# Altium PCB PCB2.PcbDoc
Units mil, origin at the board's own origin, x right, y up, seen from the top; angles counter-clockwise.
Board outline 6000 x 4000 mil, 2 copper layers (Top Layer, Bottom Layer); 141 components, 86 nets, 423 pads, 54 vias.
Unrouted connection lines stored in the file: 285.
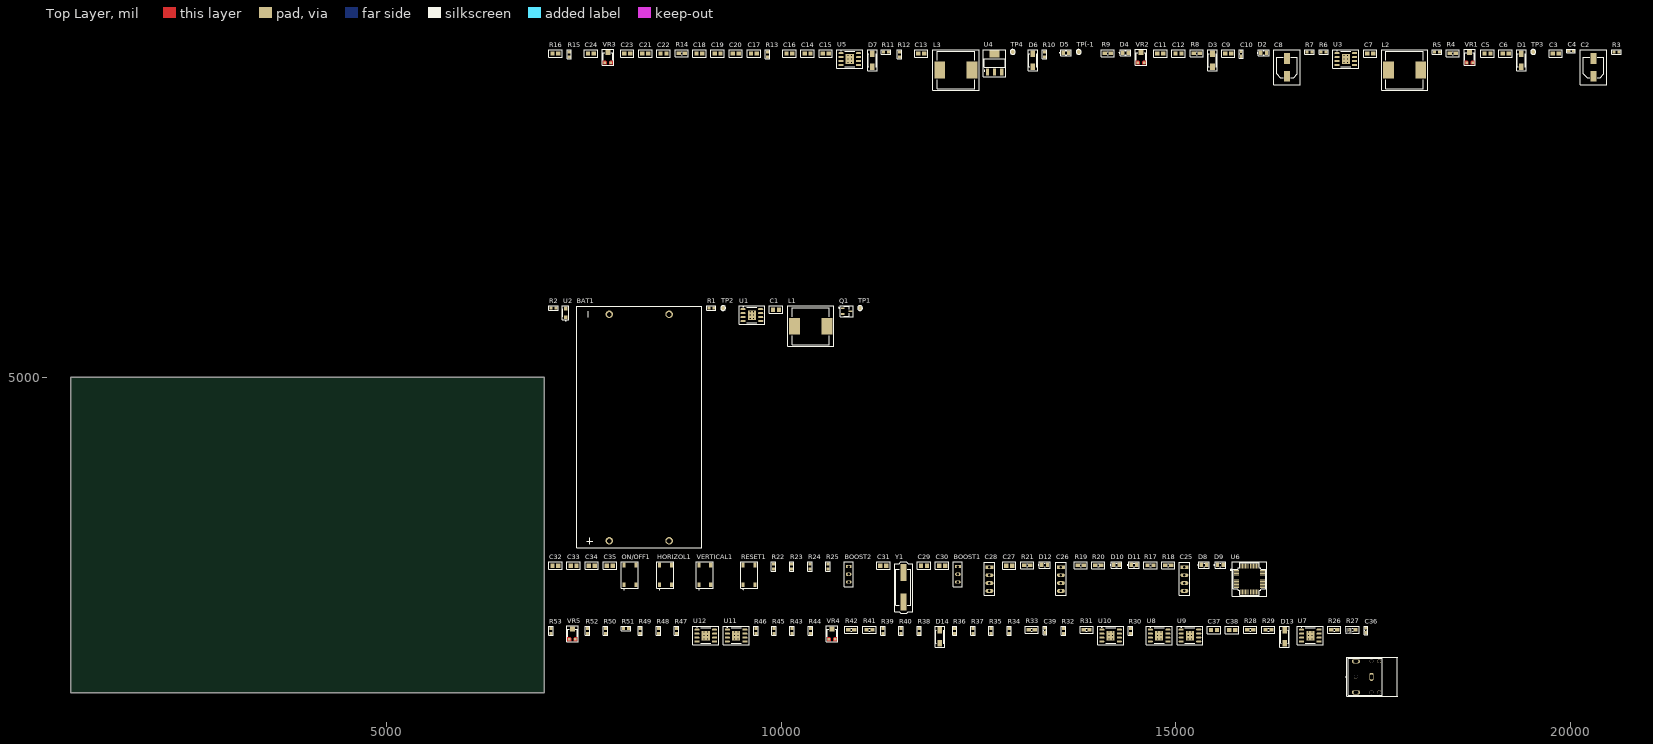
[diagram p0: Top Layer view]
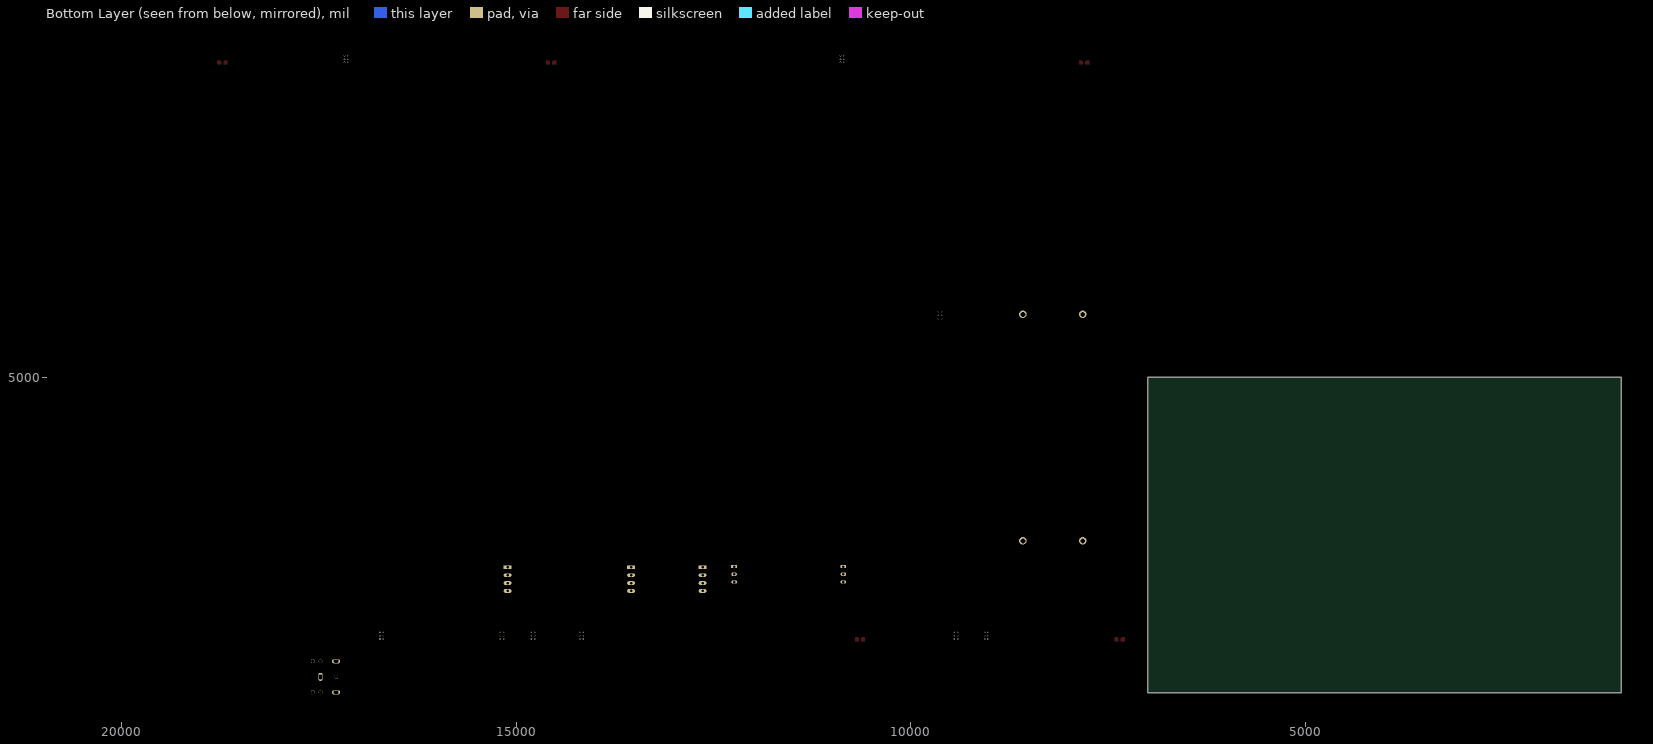
[diagram p1: Bottom Layer view, seen from below]

## Layer stack, top to bottom
Top Solder: solder mask 0.4, Solder Resist, Dk 3.5
Top Layer: signal copper 1.4
Dielectric 1: dielectric 12.6, FR-4, Dk 4.8
Bottom Layer: signal copper 1.4
Bottom Solder: solder mask 0.4, Solder Resist, Dk 3.5

## Board outline
1000,1000 7000,1000 7000,5000 1000,5000

## Design rules (kind name [scope] priority, off if disabled: settings)
Clearance [All] p1: gap=10 ignorepadtopadclearanceinfootprint=FALSE
PolygonConnect [All] p1: connectstyle=Relief reliefconductorwidth=10 reliefentries=4 polygonreliefangle="90 Angle" airgapwidth=10
RoutingVias [All] p1: holewidth=28 width=50 viastyle="Through Hole" minholewidth=28 minwidth=50 maxholewidth=28 maxwidth=50
SolderMaskExpansion [All] p1: expansion=4 istentingtop=FALSE
SupplyNets "Schematic Supply Nets_4" [InNet('-5')] p1: voltage=0.000
SupplyNets "Schematic Supply Nets_3" [InNet('+VBAT')] p2: voltage=0.000
SupplyNets "Schematic Supply Nets_2" [InNet('+5')] p3: voltage=0.000
SupplyNets "Schematic Supply Nets_1" [InNet('VDD3.3V')] p4: voltage=0.000
SupplyNets "Schematic Supply Nets" [InNet('GND')] p5: voltage=0.000
Width [All] p1: maxlimit=10 minlimit=10 preferedwidth=10
30 further rules are at their usual default settings.

## Classes and differential pairs
component class "Power supply": BAT1 C1 C2 C3 C4 C5 C6 C7 C8 C9 C10 C11 C12 C13 C14 C15 C16 C17 C18 C19 C20 C21 C22 C23 C24 D1 D2 D3 D4 D5 D6 D7 L1 L2 L3 Q1 R1 R2 R3 R4 R5 R6 R7 R8 R9 R10 R11 R12 R13 R14 R15 R16 TP1 TP2 TP3 TP4 TP(-1 U1 U2 U3 U4 U5 VR1 VR2 VR3
component class MCU: BOOST1 BOOST2 C25 C26 C27 C28 C29 C30 C31 C32 C33 C34 C35 D8 D9 D10 D11 D12 HORIZOL1 ON/OFF1 R17 R18 R19 R20 R21 R22 R23 R24 R25 RESET1 U6 VERTICAL1 Y1
component class EOG_FRONT_END: C36 C37 C38 C39 D13 D14 J1 R26 R27 R28 R29 R30 R31 R32 R33 R34 R35 R36 R37 R38 R39 R40 R41 R42 R43 R44 R45 R46 R47 R48 R49 R50 R51 R52 R53 U7 U8 U9 U10 U11 U12 VR4 VR5

## Components (designator, comment, footprint, x,y, rotation, side; value= is the part's Value field where it differs from the comment)
BAT1 "Dual_Battery_Case" Dual_BAT_PCB 8205,4360 r90 top value=N/A
BOOST1 "CONNECTOR_4" CON-3 12240,2600 r0 top value=N/A
BOOST2 "CONNECTOR_4" CON-3 10855,2600 r0 top value=N/A
C1 "0.01uF" "CAPCER 0805 SMD" 9935,5855 r0 top
C2 "330uF" "CAP ALU 6377" 20295,8925 r90 top
C3 "0.1uF" "CAPCER 0805 SMD" 19815,9100 r0 top
C4 "10uF" "CAPCER 0603 SMD" 20010,9130 r0 top
C5 "0.1uF" "CAPCER 0805 SMD" 18950,9100 r0 top
C6 "0.1uF" "CAPCER 0805 SMD" 19180,9100 r0 top
C7 "0.01uF" "CAPCER 0805 SMD" 17465,9100 r0 top
C8 "220uF" "CAP ALU 6377" 16410,8925 r90 top
C9 "0.1uF" "CAPCER 0805 SMD" 15665,9100 r0 top
C10 "10uF" "CAPCER 0603 SMD" 15830,9095 r90 top
C11 "0.1uF" "CAPCER 0805 SMD" 14805,9100 r0 top
C12 "0.1uF" "CAPCER 0805 SMD" 15035,9100 r0 top
C13 "0.1uF" "CAPCER 0805 SMD" 11775,9100 r0 top
C14 "47pF" "CAPCER 0805 SMD" 10335,9100 r0 top
C15 "47pF" "CAPCER 0805 SMD" 10565,9100 r0 top
C16 "22uF" "CAPCER 0805 SMD" 10105,9100 r0 top
C17 "22uF" "CAPCER 0805 SMD" 9655,9100 r0 top
C18 "4.7uF" "CAPCER 0805 SMD" 8965,9100 r0 top
C19 "4.7uF" "CAPCER 0805 SMD" 9195,9100 r0 top
C20 "4.7uF" "CAPCER 0805 SMD" 9425,9100 r0 top
C21 "1nF" "CAPCER 0805 SMD" 8280,9100 r0 top
C22 "10uF" "CAPCER 0805 SMD" 8510,9100 r0 top
C23 "0.01uF" "CAPCER 0805 SMD" 8050,9100 r0 top
C24 "47pF" "CAPCER 0805 SMD" 7590,9100 r0 top
C25 "CONNECTOR_4" CON-4 15110,2590 r0 top value=CON-4
C26 "CONNECTOR_4" CON-4 13545,2590 r0 top value=CON-4
C27 "22pF" "CAPCER 0805 SMD" 12890,2610 r0 top
C28 "CONNECTOR_4" CON-4 12640,2590 r0 top value=CON-4
C29 "4.7uF" "CAPCER 0805 SMD" 11810,2610 r0 top
C30 "4.7uF" "CAPCER 0805 SMD" 12040,2610 r0 top
C31 "22pF" "CAPCER 0805 SMD" 11295,2610 r0 top
C32 "0.1uF" "CAPCER 0805 SMD" 7140,2610 r0 top
C33 "0.1uF" "CAPCER 0805 SMD" 7370,2610 r0 top
C34 "0.1uF" "CAPCER 0805 SMD" 7600,2610 r0 top
C35 "0.1uF" "CAPCER 0805 SMD" 7830,2610 r0 top
C36 "10uF" "CAPCER 0603 SMD" 17410,1790 r90 top
C37 "0.1uF" "CAPCER 0805 SMD" 15485,1795 r0 top
C38 "0.1uF" "CAPCER 0805 SMD" 15715,1795 r0 top
C39 "10uF" "CAPCER 0603 SMD" 13345,1790 r90 top
D1 "SS34" DO-214AC 19380,9015 r90 top
D2 "LED_RED" "LED 0805 SMD" 16115,9110 r0 top value=5V
D3 "SS34" DO-214AC 15465,9015 r90 top
D4 "LED_RED" "LED 0805 SMD" 14365,9110 r0 top value=3.3V
D5 "LED_RED" "LED 0805 SMD" 13610,9110 r0 top value=VBAT
D6 "SS34" DO-214AC 13190,9015 r90 top
D7 "SS34" DO-214AC 11155,9015 r90 top
D8 "LED_RED" "LED 0805 SMD" 15360,2620 r0 top value=LED_UP
D9 "LED_RED" "LED 0805 SMD" 15565,2620 r0 top value=LED_RIGHT
D10 "LED_RED" "LED 0805 SMD" 14250,2620 r0 top value=LED_DOWN
D11 "LED_RED" "LED 0805 SMD" 14470,2620 r0 top value=LED_LEFT
D12 "LED_RED" "LED 0805 SMD" 13340,2620 r0 top value=LED_LIFE
D13 "SMAJ5.0" DO-214AC 16380,1710 r90 top value=3A-1KV
D14 "SMAJ5.0" DO-214AC 12010,1710 r90 top value=3A-1KV
HORIZOL1 "BUTTON" BUTTON_SMD 8535,2495 r90 top value=N/A
J1 "JACK 3.5mm" JACK_3.5 17470,1196.85 r90 top value=N/A
L1 "10uH" "INDUCTOR 1280 SMD" 10375,5645 r0 top
L2 "15uH" "INDUCTOR 1280 SMD" 17900,8890 r0 top
L3 "10uH" "INDUCTOR 1280 SMD" 12215,8890 r0 top
ON/OFF1 "BUTTON" BUTTON_SMD 8085,2495 r90 top value=N/A
Q1 "AO3407A" SOT23-3 10830,5835 r0 top value="30V 4.3A"
R1 "10KR" "RESC 0603(1608) SMD" 9115,5875 r0 top
R2 "100KR" "RESC 0603(1608) SMD" 7115,5875 r0 top
R3 "10KR" "RESC 0603(1608) SMD" 20585,9120 r0 top
R4 "33KR" "RESC 0805 SMD" 18510,9105 r0 top
R5 "10KR" "RESC 0603(1608) SMD" 18310,9120 r0 top
R6 "10KR" "RESC 0603(1608) SMD" 16875,9120 r0 top
R7 "10KR" "RESC 0603(1608) SMD" 16695,9120 r0 top
R8 "330R" "RESC 0805 SMD" 15265,9105 r0 top
R9 "330R" "RESC 0805 SMD" 14140,9105 r0 top
R10 "680R" "RESC 0603(1608) SMD" 13335,9090 r90 top
R11 "0R" "RESC 0603(1608) SMD" 11330,9120 r0 top value=0KR
R12 "10KR" "RESC 0603(1608) SMD" 11500,9090 r90 top
R13 "10KR" "RESC 0603(1608) SMD" 9825,9090 r90 top
R14 "200R" "RESC 0805 SMD" 8740,9105 r0 top
R15 "27KR" "RESC 0603(1608) SMD" 7315,9090 r90 top
R16 "2.4KR" "CAPCER 0805 SMD" 7140,9100 r0 top
R17 "330R" "RESC 0805 SMD" 14680,2615 r0 top
R18 "330R" "RESC 0805 SMD" 14905,2615 r0 top
R19 "330R" "RESC 0805 SMD" 13795,2615 r0 top
R20 "330R" "RESC 0805 SMD" 14020,2615 r0 top
R21 "330R" "RESC 0805 SMD" 13120,2615 r0 top
R22 "10KR" "RESC 0603(1608) SMD" 9905,2600 r90 top
R23 "10KR" "RESC 0603(1608) SMD" 10135,2600 r90 top
R24 "10KR" "RESC 0603(1608) SMD" 10365,2600 r90 top
R25 "10KR" "RESC 0603(1608) SMD" 10595,2600 r90 top
R26 "300KR" "RESC 0805 SMD" 17010,1800 r0 top
R27 "1.6MR" "RESC 0805 SMD" 17240,1800 r0 top
R28 "270R" "RESC 0805 SMD" 15945,1800 r0 top
R29 "270R" "RESC 0805 SMD" 16175,1800 r0 top
R30 "10KR" "RESC 0603(1608) SMD" 14425,1785 r90 top
R31 "300KR" "RESC 0805 SMD" 13870,1800 r0 top
R32 "10KR" "RESC 0603(1608) SMD" 13580,1785 r90 top
R33 "1.6MR" "RESC 0805 SMD" 13175,1800 r0 top
R34 "10KR" "RESC 0603(1608) SMD" 12890,1785 r90 top
R35 "10KR" "RESC 0603(1608) SMD" 12660,1785 r90 top
R36 "510R" "RESC 0603(1608) SMD" 12200,1785 r90 top value=20R
R37 "510R" "RESC 0603(1608) SMD" 12430,1785 r90 top value=20R
R38 "10KR" "RESC 0603(1608) SMD" 11750,1785 r90 top
R39 "10KR" "RESC 0603(1608) SMD" 11290,1785 r90 top
R40 "10KR" "RESC 0603(1608) SMD" 11520,1785 r90 top
R41 "5.6KR" "RESC 0805 SMD" 11120,1800 r0 top
R42 "5.6KR" "RESC 0805 SMD" 10890,1800 r0 top
R43 "12KR" "RESC 0603(1608) SMD" 10140,1785 r90 top value=30R
R44 "12KR" "RESC 0603(1608) SMD" 10370,1785 r90 top value=30R
R45 "300R" "RESC 0603(1608) SMD" 9910,1785 r90 top
R46 "300R" "RESC 0603(1608) SMD" 9680,1785 r90 top
R47 "10KR" "RESC 0603(1608) SMD" 8675,1785 r90 top
R48 "10KR" "RESC 0603(1608) SMD" 8445,1785 r90 top
R49 "10KR" "RESC 0603(1608) SMD" 8215,1785 r90 top
R50 "10KR" "RESC 0603(1608) SMD" 7775,1785 r90 top
R51 "10KR" "RESC 0603(1608) SMD" 8035,1815 r0 top
R52 "10KR" "RESC 0603(1608) SMD" 7545,1785 r90 top value=20KR
R53 "10KR" "RESC 0603(1608) SMD" 7085,1785 r90 top
RESET1 "BUTTON" BUTTON_SMD 9595,2495 r90 top value=N/A
TP1 "TEST_POINT" Test_point 11000,5875 r0 top value=N/A
TP2 "TEST_POINT" Test_point 9265,5875 r90 top value=N/A
TP3 "TEST_POINT" Test_point 19530,9120 r90 top value=N/A
TP4 "TEST_POINT" Test_point 12935,9120 r90 top value=N/A
TP(-1 "TEST_POINT" Test_point 13770,9120 r90 top value=N/A
U1 "TPS5430DDAR" 8-SOIC 9630,5785 r0 top value=TPS5430DDR
U2 "BZT52H" SOD-123F 7270,5815 r90 top value=12V
U3 "TPS5430DDAR" 8-SOIC 17155,9030 r0 top value=TPS5430DDR
U4 "AMS1117-ADJ" SOT-223 12705,8980 r0 top value=AMS1117
U5 "TPS54331DR" 8-SOIC 10870,9030 r0 top value=N/A
U6 "STM32F103C8T6" LQFP48 15935,2440 r0 top
U7 "INA128UA" 8-SOIC 16705,1725 r0 top value=N/A
U8 "OPA188AID" 8-SOIC 14790,1725 r0 top
U9 "OPA188AID" 8-SOIC 15180,1725 r0 top value=N/A
U10 "OPA188AID" 8-SOIC 14175,1725 r0 top
U11 "OPA2134UA" 8-SOIC 9430,1725 r0 top value=N/A
U12 "OPA188AID" 8-SOIC 9045,1725 r0 top value=N/A
VERTICAL1 "BUTTON" BUTTON_SMD 9035,2495 r90 top value=N/A
VR1 "VR_10KR" EVM3E 18725,9045 r0 top
VR2 "VR_10KR" EVM3E 14560,9045 r0 top
VR3 "VR_10KR" EVM3E 7805,9045 r0 top
VR4 "VR_10KR" EVM3E 10645,1740 r0 top
VR5 "VR_10KR" EVM3E 7355,1740 r0 top
Y1 "Thạch Anh 8Mhz" HC49-S 11550,2335 r90 top value=8MHz

## Footprints (in the part's own frame and the unit in brackets; to place one, negate y for a bottom-side part, rotate by r counter-clockwise, add the part's x,y. Pads: shape width x height; smd on the part's side, far side on the other; paste and mask are expansions set on the pad)
8-SOIC [mm] "SOIC, 8-Leads, Body 4.90x3.90mm, Pitch 1.27mm, Thermal Pad 3.10x2.60mm, IPC Low Density"
  oval 1.65x0.65 smd: 1(-2.825,1.905) 2(-2.825,0.635) 3(-2.825,-0.635) 4(-2.825,-1.905) 5(2.825,-1.905) 6(2.825,-0.635) 7(2.825,0.635) 8(2.825,1.905)
  rect 2.6x3.1 smd: 9(0,0)
  silkscreen extent -4.15,-3 4.15,3, body extent -3,-2.5 3,2.5, height 1.7
BUTTON_SMD [mm]
  rect 1.5x1 smd: 1(-3.15,1.925) 1(3.15,1.925) 2(-3.15,-1.875) 2(3.15,-1.875)
  silkscreen extent -4.75,-2.72 4.2,2.78, body extent -3.3,-2.47 3.3,2.53, height 1.52
"CAP ALU 6377" [mm] "Aluminum Electrolytic Capacitor, Body 6.60x6.60x7.70mm, IPC Low Density"
  rect 3.45x1.85 smd: 1(-2.85,0) 2(2.85,0)
  silkscreen extent -5.6,-4.3 5.6,4.3, body extent -3.8,-3.3 3.8,3.3, height 7.7
"CAPCER 0603 SMD" [mm]
  rect 1x0.95 smd mask+0.076: 1(-0.75,0) 2(0.75,0)
  silkscreen extent -1.35,-0.58 1.37,0.58, body extent -0.8,-0.4 0.8,0.4, height 0.9
"CAPCER 0805 SMD" [mm]
  rect 1.4x1.4 smd: 1(-0.955,0) 2(0.955,0)
  silkscreen extent -2.15,-1.2 2.15,1.2, body extent -1,-0.64 1,0.64, height 1.25
CON-3 [mil]
  rect 72x40 hole 31.5: 1(0,0)
  oval 72x40 hole 31.5: 2(0,-98.43) 3(0,-196.85)
  round 40 on Top Overlay: ""(85,9)
  silkscreen extent -58,-255 57,58, body extent -50,-248 50,52, height 337
CON-4 [mm]
  rect 2.5x1.2 hole 0.8: 1(0,0)
  oval 2.5x1.2 hole 0.8: 2(0,-2.54) 3(0,-5.08) 4(0,-7.62)
  round 1.016 on Top Overlay: ""(2.311,0.178)
  silkscreen extent -1.63,-9.02 1.68,1.68, body extent -1.14,-8.76 1.4,1.4, height 8.55
DO-214AC [mm]
  rect 2.12x1.5 smd: 1(-2.115,0) 2(2.115,0)
  silkscreen extent -3.42,-1.53 3.42,1.53, body extent -2.57,-1.27 2.57,1.29, height 2.5
Dual_BAT_PCB [mm]
  round 2.4 hole 1.6: 1+(-36.422,9.726) 1-(36.478,9.726) 2+(-36.422,-9.574) 2-(36.478,-9.574)
  silkscreen extent -38.67,-20.03 39.03,20.18, body extent -38.56,-20.07 39.14,20.14, height 24.74
EVM3E [mm]
  rect 0.8x0.8 smd paste-1 mask+0: 1(-1.014,-1.535) 3(0.986,-1.535)
  rect 1.6x1.5 smd: 2(-0.014,1.715)
  Top Layer region: -0.414,-1.235 -0.414,-2.135 -1.614,-2.135 -1.614,-0.935 -0.714,-0.935
  Top Layer region: 1.586,-2.135 0.386,-2.135 0.386,-1.235 0.686,-0.935 1.586,-0.935
  silkscreen extent -1.83,-2.41 1.83,2.72, body extent -1.56,-2.09 1.54,1.71, height 1.62
HC49-S [mm]
  rect 5.5x2 smd: 1(-4.75,0.025) 2(4.75,0.025)
  silkscreen extent -8.28,-2.95 8.2,2.88, body extent -6.7,-2.42 6.7,2.48, height 4.3
"INDUCTOR 1280 SMD" [mm] "Precision Wire Wound Inductor, 2-Leads, Body 12.00x12.00mm, IPC Low Density"
  rect 3.5x5.4 smd: 1(-5.2,0) 2(5.2,0)
  silkscreen extent -7.42,-6.5 7.42,6.5, body extent -6.1,-6 6.1,6, height 8.1
JACK_3.5 [mm]
  oval 2.616x1.308 hole 0.8 slot 1.5 at 0 deg: 1(0.127,-0.254)
  oval 1.308x2.616 hole 0.8 slot 1.5 at 90 deg: 2(5.127,4.746) 3(-4.873,4.746)
  round 1.2 hole 1.2 unplated: ""(-4.873,-2.754) ""(-4.873,-0.254) ""(0.127,4.746) ""(5.127,-2.754) ""(5.127,-0.254)
  silkscreen extent -6.12,-8.64 6.38,8.05, body extent -5.87,-7.07 6.13,7.23, height 6.01
"LED 0805 SMD" [mm]
  rect 1.1x1.45 smd: A(0.9,0) C(-0.9,0)
  silkscreen extent -2.1,-1 1.7,1, body extent -1,-0.63 1,0.63, height 0.7
LQFP48 [mm]
  rrect50% 1.56x0.28 smd: 1(-4.18,2.775) 2(-4.18,2.275) 3(-4.18,1.775) 4(-4.18,1.275) 5(-4.18,0.775) 6(-4.18,0.275) 7(-4.18,-0.225) 8(-4.18,-0.725) 9(-4.18,-1.225) 10(-4.18,-1.725) 11(-4.18,-2.225) 12(-4.18,-2.725) 25(4.18,-2.725) 26(4.18,-2.225) 27(4.18,-1.725) 28(4.18,-1.225) 29(4.18,-0.725) 30(4.18,-0.225) 31(4.18,0.275) 32(4.18,0.775) 33(4.18,1.275) 34(4.18,1.775) 35(4.18,2.275) 36(4.18,2.775)
  rrect50% 0.28x1.56 smd: 13(-2.75,-4.155) 14(-2.25,-4.155) 15(-1.75,-4.155) 16(-1.25,-4.155) 17(-0.75,-4.155) 18(-0.25,-4.155) 19(0.25,-4.155) 20(0.75,-4.155) 21(1.25,-4.155) 22(1.75,-4.155) 23(2.25,-4.155) 24(2.75,-4.155) 37(2.75,4.205) 38(2.25,4.205) 39(1.75,4.205) 40(1.25,4.205) 41(0.75,4.205) 42(0.25,4.205) 43(-0.25,4.205) 44(-0.75,4.205) 45(-1.25,4.205) 46(-1.75,4.205) 47(-2.25,4.205) 48(-2.75,4.205)
  silkscreen extent -6.15,-5.51 5.61,5.54, body extent -4.5,-4.47 4.5,4.53, height 1.6
"RESC 0603(1608) SMD" [mm] "Chip Resistor 0603"
  rect 0.95x1 smd: 1(-0.8,0) 2(0.8,0)
  silkscreen extent -1.5,-0.71 1.5,0.71, body extent -0.8,-0.4 0.8,0.4, height 0.45
"RESC 0805 SMD" [mm]
  rect 1.4x1.2 smd: 1(-0.955,0) 2(0.955,0)
  silkscreen extent -2.1,-1.1 2.1,1.1, body extent -1,-0.6 1,0.6, height 0.5
SOD-123F [mm]
  rect 1.2x1.2 smd paste-0.05: 1(-1.4,0) 2(1.4,0)
  silkscreen extent -2.6,-1.06 2.25,1.04, body extent -1.75,-0.8 1.75,0.8, height 1.2
SOT23-3 [mm]
  rrect25% 1.21x0.59 smd: 1(-1.255,0.95) 2(-1.255,-0.95) 3(1.255,0)
  silkscreen extent -2.6,-1.8 2.11,1.8, body extent -1.52,-1.52 1.47,1.57, height 1.25
SOT-223 [mm]
  rect 1x2.4 smd: 1(-2.306,-2.893) 2(-0.006,-2.893) 3(2.294,-2.893)
  rect 3.3x2.4 smd: 2(-0.006,2.907)
  silkscreen extent -3.63,-4.37 3.57,4.33, body extent -3.26,-3.55 3.24,3.41, height 1.68
Test_point [mm]
  round 1.5 smd: 1(0,0)
  silkscreen extent -0.8,-0.8 0.8,0.8

## Part data
BAT1: library part DB-0031, "Dual_Battery_Case_18650", Power Rate=N/A, Design Item ID=DB-0031, Footprint Path=.\Database_Library\Library.PcbLib, Footprint Type=TFT, Supplier Link=https://www.thegioiic.com/de-pin-2x18650-han-pcb, Tolerance=N/A, Type=Case
BOOST1 BOOST2: library part DB-0054, "Hàng Rào Đực Đơn 2.54mm 40 Chân 1 Hàng Cao 11.2mm Xuyên Lỗ", Power Rate=N/A, Design Item ID=DB-0054, Footprint Type=TFT, Size=TFT, Supplier=THEGIOIIC, Supplier Link=https://www.thegioiic.com/hang-rao-duc-don-2-54mm-40-chan-1-hang-cao-11-2mm-xuyen-lo, Supplier Part Number="Hàng Rào Đực Đơn 2.54mm 40 Chân 1 Hàng Cao 11.2mm Xuyên Lỗ", Tolerance=N/A, Type=CONNECTOR
C1 C7 C23: library part DB-0010, "CAPACITOR SMD 0.01uF 50V 10% 0805", Power Rate=N/A, Supplier Part Number="Tụ Gốm 0805 410nF 50V", Tolerance=10%, Design Item ID=DB-0010, Footprint Type=SMD, Size=0805, Supplier=THEGIOIIC, Supplier Link=https://www.thegioiic.com/tu-gom-0805-10nf-50v, Type=CAPACITOR
  C1 C7: Footprint Path=.\Database_Library\Library.PcbLib
C2: library part DB-0044, "CAPACITOR ALU SMD 220uF 6.3V 20% 6377", Power Rate=N/A, Supplier Part Number="Tụ Nhôm SMD 330uF 6.3V 6.3x7.7mm", Tolerance=20%, Design Item ID=DB-0044, Footprint Type=SMD, Size=6377, Supplier=THEGIOIIC, Supplier Link=https://www.thegioiic.com/tu-nhom-smd-330uf-6-3v-6-3x7-7mm, Type="CAPACITOR ALU"
C3 C5 C6 C9 C11 C12 C13 C32 C33 C34 C35 C37 C38: library part DB-0017, "CAPACITOR SMD 0.1uF 50V 10% 0603", Power Rate=N/A, Supplier Part Number="Tụ Gốm 0603 100nF (0.1uF) 25V", Tolerance=10%, Design Item ID=DB-0017, Footprint Type=SMD, Size=0603, Supplier=THEGIOIIC, Supplier Link=https://www.thegioiic.com/tu-gom-0603-100nf-0-1uf-25v, Type=CAPACITOR
  C3 C5 C6 C9 C11 C12: Footprint Path=.\Database_Library\Library.PcbLib
C4 C10 C36 C39: library part DB-0018, "CAPACITOR SMD 10uF 25V 10% 0805", Power Rate=N/A, Supplier Part Number="Tụ Gốm 0805 10uF 25V", Tolerance=10%, Design Item ID=DB-0018, Footprint Type=SMD, Size=0805, Supplier=THEGIOIIC, Supplier Link=https://www.thegioiic.com/tu-gom-0805-10uf-25v, Type=CAPACITOR
  C4 C10: Footprint Path=.\Database_Library\Library.PcbLib
C8: library part DB-0013, "CAPACITOR ALU SMD 220uF 16V 10% 6377", Power Rate=N/A, Supplier Part Number="Tụ Nhôm SMD 220uF 16V 6.3x7.7mm", Design Item ID=DB-0013, Footprint Path=.\Database_Library\Library.PcbLib, Footprint Type=SMD, Size=6377, Supplier=THEGIOIIC, Supplier Link=https://www.thegioiic.com/tu-nhom-smd-220uf-16v-6-3x7-7mm, Tolerance=N/A, Type="CAPACITOR ALU"
C14 C15 C24: library part DB-0036, "CAPACITOR SMD 47pF 50V 10% 0805", Power Rate=N/A, Supplier Part Number="Tụ Gốm 0805 47pF 50V", Tolerance=10%, Design Item ID=DB-0036, Footprint Type=SMD, Size=0805, Supplier=THEGIOIIC, Supplier Link=https://www.thegioiic.com/tu-gom-0805-47pf-50v, Type=CAPACITOR
C16 C17: library part DB-0056, "CAPACITOR SMD 22uF 50V 10% 0805", Power Rate=N/A, Supplier Part Number="Tụ Gốm 0805 22uF 6.3V", Tolerance=10%, Design Item ID=DB-0056, Footprint Type=SMD, Size=0805, Supplier=THEGIOIIC, Supplier Link=https://www.thegioiic.com/tu-gom-0805-22uf-6-3v, Type=CAPACITOR
C18 C19 C20 C29 C30: library part DB-0007, "CAPACITOR SMD 4.7uF 50V 10% 0805", Power Rate=N/A, Supplier Part Number="Tụ Gốm 0805 4.7uF 50V", Tolerance=10%, Design Item ID=DB-0007, Footprint Type=SMD, Size=0805, Supplier=THEGIOIIC, Supplier Link=https://www.thegioiic.com/tu-gom-0805-4-7uf-50v, Type=CAPACITOR
C21: library part DB-0037, "CAPACITOR SMD 1nF 50V 10% 0805", Power Rate=N/A, Supplier Part Number="Tụ Gốm 0805 1nF 50V", Tolerance=10%, Design Item ID=DB-0037, Footprint Type=SMD, Size=0805, Supplier=THEGIOIIC, Supplier Link=https://www.thegioiic.com/tu-gom-0805-1nf-50v, Type=CAPACITOR
C22: library part DB-0058, "CAPACITOR SMD 10uF 25V 10% 0805", Power Rate=N/A, Supplier Part Number="Tụ Gốm 0805 10uF 25V", Tolerance=10%, Design Item ID=DB-0058, Footprint Type=SMD, Size=0805, Supplier=THEGIOIIC, Supplier Link=https://www.thegioiic.com/tu-gom-0805-10uf-25v, Type=CAPACITOR
C25 C26 C28: library part DB-0049, "Hàng Rào Đực Đơn 2.54mm 40 Chân 1 Hàng Cao 11.2mm Xuyên Lỗ", Power Rate=N/A, Design Item ID=DB-0049, Footprint Type=TFT, Size=TFT, Supplier=THEGIOIIC, Supplier Link=https://www.thegioiic.com/hang-rao-duc-don-2-54mm-40-chan-1-hang-cao-11-2mm-xuyen-lo, Supplier Part Number="Hàng Rào Đực Đơn 2.54mm 40 Chân 1 Hàng Cao 11.2mm Xuyên Lỗ", Tolerance=N/A, Type=CONNECTOR
C27 C31: library part DB-0047, "CAPACITOR SMD 22pF 50V 10% 0805", Power Rate=N/A, Supplier Part Number="Tụ Gốm 0805 22pF 50V", Tolerance=10%, Design Item ID=DB-0047, Footprint Type=SMD, Size=0805, Supplier=THEGIOIIC, Supplier Link=https://www.thegioiic.com/tu-gom-0805-22pf-50v, Type=CAPACITOR
D1 D3 D6 D7: library part DB-0032, "SS34 SMC Diode Schottky 3A", Power Rate=N/A, Supplier Part Number="TWGMC SS34 SMA Diode Schottky 3A", Design Item ID=DB-0032, Footprint Type=SMD, Size=SMA, Supplier=THEGIOIIC, Supplier Link=https://www.thegioiic.com/twgmc-ss34-sma-diode-schottky-3a, Tolerance=N/A, Type=DIODE
D2 D4 D5 D8 D9 D10 D11 D12: library part DB-0020, "Size 2x1.2mm, điện áp 1.8-2.6VDC", Power Rate=N/A, Supplier Part Number="LED Đỏ 0805 Dán SMD Trong Suốt Harvatek", Design Item ID=DB-0020, Footprint Type=SMD, Size=0806, Supplier=THEGIOIIC, Supplier Link=https://www.thegioiic.com/led-do-0805-dan-smd-trong-suot-harvatek, Tolerance=N/A, Type=LED
D13 D14: library part DB-0021, "TVS DIODE 5VWM 9.2VC SMA", Power Rate=N/A, Design Item ID=DB-0021, Footprint Type=SMD, Size=SMA, Supplier=DIGIKEY, Supplier Link=https://www.digikey.com/en/products/detail/diodes-incorporated/smaj5-0a-13/278666, Supplier Part Number="TVS DIODE 5VWM 9.2VC SMA", Tolerance=N/A, Type=DIODE
HORIZOL1 ON/OFF1 RESET1 VERTICAL1: library part DB-0051, "Nút Nhấn 4x4mm Cao 1.5mm 4 Chân SMD Chống Nước", Power Rate=N/A, Design Item ID=DB-0051, Footprint Type=SMD, Size=BUTTON_SMD, Supplier=THEGIOIIC, Supplier Link=https://www.thegioiic.com/nut-nhan-4x4mm-cao-1-5mm-4-chan-smd-chong-nuoc, Supplier Part Number="Nút Nhấn 4x4mm Cao 1.5mm 4 Chân SMD Chống Nước", Tolerance=N/A, Type=BUTTON
J1: library part DB-0053, "Jack Audio 3.5mm PJ-320D PJ320D Hàn Board chân dán", Power Rate=N/A, Design Item ID=DB-0053, Footprint Type=SMD, Size=SMD, Supplier="Điện tử Minh Nguyên", Supplier Link=https://chipn24.com/g30-jack-audio-3-5mm-pj-320d-pj320d-han-board-chan-dan-id2179.html, Supplier Part Number="Jack Audio 3.5mm PJ-320D PJ320D Hàn Board chân dán", Tolerance=N/A, Type=CONNECTOR
L1 L3: library part DB-0043, "INDUCTOR SMD 10uH 1280-100 7.1A", Power Rate=N/A, Supplier Part Number="Cuộn Cảm Dán SMD CDRH127 1280-100 10uH 7.8A", Tolerance=20%, Design Item ID=DB-0043, Footprint Type=SMD, Size=1280, Supplier=THEGIOIIC, Supplier Link=https://www.thegioiic.com/cuon-cam-dan-smd-cdrh127-1280-100-10uh-7-8a, Type=INDUCTOR
L2: library part DB-0033, "INDUCTOR SMD 15uH 1280-150 7.1A", Power Rate=N/A, Supplier Part Number="Cuộn Cảm Dán SMD CDRH127 1280-150 15uH 7.1A", Tolerance=20%, Design Item ID=DB-0033, Footprint Type=SMD, Size=1280, Supplier=THEGIOIIC, Supplier Link=https://www.thegioiic.com/cuon-cam-dan-smd-cdrh127-1280-150-15uh-7-1a, Type=INDUCTOR
Q1: library part DB-0041, "AO3407A MOSFET Kênh P 30V 4.3A SOT-23-3", Power Rate=N/A, Design Item ID=DB-0041, Footprint Type=SMD, Size=SOT23-3, Supplier=THEGIOIIC, Supplier Link=https://www.thegioiic.com/ao3407a-mosfet-kenh-p-30v-4-3a-sot-23-3, Supplier Part Number="AO3407A MOSFET Kênh P 30V 4.3A SOT-23-3", Tolerance=N/A, Type=P_MOSFET
R1 R3 R5 R6 R7 R12 R13 R22 R23 R24 R25 R30 R32 R34 R35 R38 R39 R40 R47 R48 R49 R50 R51 R52 R53: library part DB-0003, "RESISTOR SMD 10KR OHM 1% 100mW 0603", Power Rate=100mW, Supplier Part Number="Điện Trở 10 KOhm 0603 1%", Tolerance=1%, Design Item ID=DB-0003, Footprint Type=SMD, Size=0603, Supplier=THEGIOIIC, Supplier Link=https://www.thegioiic.com/dien-tro-10-kohm-0603-1-, Type=RESISTOR
  R1 R3 R6 R7: Footprint Path=.\Database_Library\Library.PcbLib
R2: library part DB-0008, "RESISTOR SMD 100KR OHM 1% 100mW 0603", Power Rate=100mW, Supplier Part Number="Điện Trở 100 KOhm 0603 1%", Tolerance=1%, Design Item ID=DB-0008, Footprint Type=SMD, Size=0603, Supplier=THEGIOIIC, Supplier Link=https://www.thegioiic.com/dien-tro-100-kohm-0603-1-, Type=RESISTOR
R4: library part DB-0059, "RESISTOR SMD 33KR OHM 1% 125mW 0805", Power Rate=125mW, Supplier Part Number="Điện Trở 24 KOhm 0805 Điện Trở 33 KOhm 0805 1%", Tolerance=1%, Design Item ID=DB-0059, Footprint Type=SMD, Size=0805, Supplier=THEGIOIIC, Supplier Link=https://www.thegioiic.com/dien-tro-33-kohm-0805-1-, Type=RESISTOR
R8 R9 R17 R18 R19 R20 R21: library part DB-0048, "RESISTOR SMD 330R OHM 1% 125mW 0805", Power Rate=125mW, Supplier Part Number="Điện Trở 330 Ohm 0805 1%", Tolerance=1%, Design Item ID=DB-0048, Footprint Type=SMD, Size=0806, Supplier=THEGIOIIC, Supplier Link=https://www.thegioiic.com/dien-tro-330-ohm-0805-1-, Type=RESISTOR
R10: library part DB-0001, "RESISTOR SMD 680R OHM 5% 100mW 0603", Power Rate=100mW, Supplier Part Number="Điện Trở 680 Ohm 0603 5%", Tolerance=5%, Design Item ID=DB-0001, Footprint Type=SMD, Size=0603, Supplier=THEGIOIIC, Supplier Link=https://www.thegioiic.com/dien-tro-680-ohm-0603-5-, Type=RESISTOR
R11: library part DB-0040, "RESISTOR SMD 0KR OHM 1% 100mW 0603", Power Rate=100MmW, Supplier Part Number="Điện Trở 0 Ohm 0603 1%", Tolerance=1%, Design Item ID=DB-0040, Footprint Type=SMD, Size=0603, Supplier=THEGIOIIC, Supplier Link=https://www.thegioiic.com/dien-tro-0-ohm-0603-1-, Type=RESISTOR
R14: library part DB-0057, "RESISTOR SMD 200R OHM 5% 125mW 0805", Power Rate=125mW, Supplier Part Number="Điện Trở 200 Ohm 0805 5%", Tolerance=5%, Design Item ID=DB-0057, Footprint Type=SMD, Size=0805, Supplier=THEGIOIIC, Supplier Link=https://www.thegioiic.com/dien-tro-200-ohm-0805-5-, Type=RESISTOR
R15: library part DB-0038, "RESISTOR SMD 27KR OHM 1% 100mW 0603", Power Rate=100MmW, Supplier Part Number="Điện Trở 27 KOhm 0603 1%", Tolerance=1%, Design Item ID=DB-0038, Footprint Type=SMD, Size=0603, Supplier=THEGIOIIC, Type=RESISTOR
R16: library part DB-0039, "RESISTOR SMD 2.4KR OHM 5% 100mW 0805", Power Rate=100MmW, Supplier Part Number="Điện Trở 2.4 KOhm 0805 5%", Tolerance=5%, Design Item ID=DB-0039, Footprint Type=SMD, Size=0805, Supplier=THEGIOIIC, Supplier Link=https://www.thegioiic.com/dien-tro-2-4-kohm-0805-5-, Type=RESISTOR
R26 R31: library part DB-0016, "RESISTOR SMD 300KR OHM 5% 125mW 0805", Power Rate=125mW, Supplier Part Number="Điện Trở 300 KOhm 0805 5%", Tolerance=5%, Design Item ID=DB-0016, Footprint Type=SMD, Size=0805, Supplier=THEGIOIIC, Supplier Link=https://www.thegioiic.com/dien-tro-300-kohm-0805-5-, Type=RESISTOR
R27 R33: library part DB-0025, "RESISTOR SMD 1.6MR OHM 5% 125mW 0805", Power Rate=125mW, Supplier Part Number="Điện Trở 1.6 KOhm 0805 5%", Tolerance=5%, Design Item ID=DB-0025, Footprint Type=SMD, Size=0805, Supplier=THEGIOIIC, Supplier Link=https://www.thegioiic.com/dien-tro-1-6-kohm-0805-5-, Type=RESISTOR
R28 R29: library part DB-0022, "RESISTOR SMD 270R OHM 5% 125mW 0805", Power Rate=125mW, Supplier Part Number="Điện Trở 270 Ohm 0805 5%", Tolerance=5%, Design Item ID=DB-0022, Footprint Type=SMD, Size=0805, Supplier=THEGIOIIC, Supplier Link=https://www.thegioiic.com/dien-tro-270-ohm-0805-5-, Type=RESISTOR
R36 R37: library part DB-0028, "RESISTOR SMD 510R OHM 1% 100mW 0603", Power Rate=100mW, Supplier Part Number="Điện Trở 510 Ohm 0603 1%", Tolerance=1%, Design Item ID=DB-0028, Footprint Type=SMD, Size=0603, Supplier=THEGIOIIC, Supplier Link=https://www.thegioiic.com/dien-tro-510-ohm-0603-1-, Type=RESISTOR
R41 R42: library part DB-0023, "RESISTOR SMD 5.6KR OHM 1% 125mW 0805", Power Rate=125mW, Supplier Part Number="Điện Trở 5.6 KOhm 0805 1%", Tolerance=1%, Design Item ID=DB-0023, Footprint Type=SMD, Size=0805, Supplier=THEGIOIIC, Supplier Link=https://www.thegioiic.com/dien-tro-5-6-kohm-0805-1-, Type=RESISTOR
R43 R44: library part DB-0027, "RESISTOR SMD 12KR OHM 1% 100mW 0603", Power Rate=100mW, Supplier Part Number="Điện Trở 12 KOhm 0603 1%", Tolerance=1%, Design Item ID=DB-0027, Footprint Type=SMD, Size=0603, Supplier=THEGIOIIC, Supplier Link=https://www.thegioiic.com/dien-tro-12-kohm-0603-1-, Type=RESISTOR
R45 R46: library part DB-0024, "RESISTOR SMD 300R OHM 1% 125mW 0603", Power Rate=125mW, Supplier Part Number="Điện Trở 300 Ohm 0603 1%", Tolerance=1%, Design Item ID=DB-0024, Footprint Type=SMD, Size=0603, Supplier=THEGIOIIC, Supplier Link=https://www.thegioiic.com/dien-tro-300-ohm-0603-1-, Type=RESISTOR
TP1 TP2 TP3 TP4 TP(-1: library part DB-0034, Power Rate=N/A, Design Item ID=DB-0034, Footprint Type=PAD, Size=PAD, Tolerance=N/A
U1 U3: library part DB-0002, "TPS543x 3A, Wide Input Range, Step-Down Converter", Power Rate=N/A, Supplier Part Number="TPS5430DDAR IC Điều Chỉnh Giảm Áp 3A 8-SOIC", Design Item ID=DB-0002, Footprint Path=.\Database_Library\Library.PcbLib, Footprint Type=SMD, Size=8-SOIC, Supplier=THEGIOIIC, Supplier Link=https://www.thegioiic.com/tps5430ddar-ic-dieu-chinh-giam-ap-3a-8-soic, Tolerance=N/A, Type=IC
U2: library part DB-0042, "BZT52H-C12 Diode Zener 12V 375mW SOD-123F", Power Rate=375mW, Tolerance=5%, Design Item ID=DB-0042, Footprint Type=SMD, Size=SOD-123F, Supplier=THEGIOIIC, Supplier Link=https://www.thegioiic.com/bzt52c5v1-diode-zener-5-1v-500mw, Supplier Part Number="BZT52H-C12 Diode Zener 12V 375mW SOD-123F", Type=DIODE_ZE
U4: library part DB-0030, "AMS1117-3.3V IC Ổn Áp 3.3V 1A SOT-223", Power Rate=N/A, Design Item ID=DB-0030, Footprint Type=SMD, Size=SOT-223, Supplier=THEGIOIIC, Supplier Link=https://www.thegioiic.com/ams1117-3-3v-ic-on-ap-3-3v-1a-sot-223, Supplier Part Number="AMS1117-3.3V IC Ổn Áp 3.3V 1A SOT-223", Tolerance=N/A, Type=IC
U5: library part DB-0035, "TPS54331DR IC Điều Chỉnh Giảm Áp 3A 8-SOIC", Power Rate=N/A, Design Item ID=DB-0035, Footprint Type=SMD, Size=8-SOIC, Supplier=THEGIOIIC, Supplier Link=https://www.thegioiic.com/tps54331dr-ic-dieu-chinh-giam-ap-3a-8-soic, Supplier Part Number="TPS54331DR IC Điều Chỉnh Giảm Áp 3A 8-SOIC", Tolerance=N/A, Type=IC
U6: library part DB-0045, "STM32F103C8T6, 32-Bit ARM Cortex M3 Microcontroller, 72MHz, 64KB FLASH, 48-LQFP / STM32F103C8T6, 32-Bit ARM Cortex M3 Microcontroller, 72MHz, 64KB FLASH, 48-LQFP", Power Rate=N/A, Design Item ID=DB-0045, Footprint Type=SMD, Size=LQFP48, Supplier=THEGIOIIC, Supplier Link=https://www.thegioiic.com/stm32f103c8t6-32-bit-arm-cortex-m3-microcontroller-72mhz-64kb-flash-48-lqfp, Supplier Part Number="STM32F103C8T6, 32-Bit ARM Cortex M3 Microcontroller, 72MHz, 64KB FLASH, 48-LQFP / STM32F103C8T6, 32-Bit ARM Cortex M3 Microcontroller, 72MHz, 64KB FLASH, 48-LQFP", Tolerance=N/A, Type=IC
U7: library part DB-0015, "Instrumentation Amplifier 1 Circuit 8-SOIC", Power Rate=N/A, Design Item ID=DB-0015, Footprint Type=SMD, Size=8-SOIC, Supplier=DIGIKEY, Supplier Link=https://www.digikey.com/en/products/detail/texas-instruments/INA128UA/300997, Supplier Part Number=INA128UA, Tolerance=N/A, Type=IC
U8 U9 U10 U12: library part DB-0014, "Zero-Drift Amplifier 1 Circuit Rail-to-Rail 8-SOIC", Power Rate=N/A, Design Item ID=DB-0014, Footprint Type=SMD, Size=8-SOIC, Supplier=DIGIKEY, Supplier Link=https://www.digikey.com/en/products/detail/texas-instruments/OPA188AID/4146941, Supplier Part Number=OPA188AID, Tolerance=N/A, Type=IC
U11: library part DB-0029, "IC AUDIO 2 CIRCUIT 8SOIC", Power Rate=N/A, Design Item ID=DB-0029, Footprint Type=SMD, Size=8-SOIC, Supplier=DIGIKEY, Supplier Link=https://www.digikey.com/en/products/detail/texas-instruments/OPA2134UA, Supplier Part Number="IC AUDIO 2 CIRCUIT 8SOIC", Tolerance=N/A, Type=IC
VR1 VR2 VR3 VR4 VR5: library part DB-0026, "EVM3E-103 Biến Trở 10 KOhm Nút Áo SMD 0.15W", Power Rate=0.15W, Tolerance=20%, Design Item ID=DB-0026, Footprint Type=SMD, Size=EVM3E, Supplier=THEGIOIIC, Supplier Link=https://www.thegioiic.com/evm3e-103-bien-tro-10-kohm-nut-ao-smd-0-15w, Supplier Part Number="EVM3E-103 Biến Trở 10 KOhm Nút Áo SMD 0.15W", Type=VRES
Y1: library part DB-0046, "Thạch Anh 8Mhz 2 Chân SMD HC49-S", Power Rate=N/A, Design Item ID=DB-0046, Footprint Type=SMD, Size=HC49-S, Supplier=THEGIOIIC, Supplier Link=https://www.thegioiic.com/thach-anh-8mhz-2-chan-smd-hc49-s, Supplier Part Number="Thạch Anh 8Mhz 2 Chân SMD HC49-S", Tolerance=N/A, Type=XTAL

## Via types
v1: diameter 19.68, hole 7.87, Top Layer to Bottom Layer, 54 vias

## Nets (pads, with @x,y where several pads share a name; then routed paths per layer and width w, separated by ;. In a path a pad name is that pad's centre, name@x,y a point inside that pad or via, vN(x,y) a via of type N, cw(c..) or ccw(c..) an arc to the next point about the centre after c; other vN are vias at no path point)
+5: C2.1 C5.1 C6.1 L1.2 R3.2 R8.1 R34.2 R48.2 TP1.1 U7.7 U8.7 U9.7 U10.7 U11.8 U12.7
+VBAT: C3.1 C4.1 C9.1 C10.1 C18.1 C19.1 C20.1 Q1.2 R1.1 R6.1 R10.1 TP2.1 TP3.1 U1.7 U2.2 U3.7 U5.2
-5: C10.2 C11.2 C12.2 TP(-1.1 U3.6 U3.9 U7.4 U8.4 U9.4 U10.4 U11.4 U12.4 VR2.1 VR2.2
  other v1: 17133.35,8986.69 17176.65,8986.69 17133.35,9030 17176.65,9030 17133.35,9073.31 17176.65,9073.31
BOOST0: BOOST2.2 U6.44
BOOST1: BOOST1.2 U6.20
ELEC(+): J1.2 R31.1
ELEC(-): J1.3 R26.1
ELEC(REF): J1.1 R50.1 U7.5 U11.7
GND: BAT1.2- BOOST1.1 BOOST2.3 C2.2 C3.2 C4.2 C5.2 C6.2 C8.1 C8.2 C9.2 C11.1 C12.1 C14.1 C15.1 C16.2 C17.2 C18.2 C19.2 C20.2 C22.2 C23.2 C24.2 C25.1 C26.1 C27.2 C28.4 C29.2 C30.2 C31.2 C32.1 C33.1 C34.1 C35.1 C39.2 D1.1 D2.C D3.1 D4.C D5.C D8.C D9.C D10.C D11.C D12.C D13.1 D14.1 HORIZOL1.1 L2.2 ON/OFF1.1 R4.1 R5.1 R7.2 R14.1 R16.1 R32.1 R33.1 R45.1 R46.1 R53.1 RESET1.1 U1.6 U1.9 U6.8 U6.23 U6.35 U6.47 U11.5 VERTICAL1.1 VR1.1 VR1.2 VR3.1 VR3.2 VR4.1 VR4.2 VR5.1 VR5.2
  other v1: 9608.35,5741.69 9651.65,5741.69 9608.35,5785 9651.65,5785 9608.35,5828.31 9651.65,5828.31
I2C1_SCL: C25.3 U6.45
I2C1_SDA: C25.2 U6.46
LED_DOWN: R19.1 U6.13
LED_LEFT: R20.1 U6.29
LED_LIFE_STM: R21.1 U6.34
LED_RIGHT: R18.1 U6.17
LED_UP: R17.1 U6.12
MODE1: C33.2 HORIZOL1.2 R23.1 U6.15
MODE2: C34.2 R24.1 U6.16 VERTICAL1.2
NetBAT1_1+: BAT1.1+ Q1.3 R2.2
NetBAT1_1-: BAT1.1- BAT1.2+
NetC1_1: C1.1 U1.1
NetC1_2: C1.2 D1.2 L1.1 U1.8
NetC7_1: C7.1 U3.1
NetC7_2: C7.2 D3.2 L2.1 U3.8
NetC13_1: C13.1 D7.2 L3.1 U5.8
NetC13_2: C13.2 U5.1
NetC14_2: C14.2 C15.2 C17.1 D6.2 L3.2 R11.2 TP4.1 U4.3
NetC21_1: C21.1 C24.1 U5.6
NetC21_2: C21.2 R15.2
NetC22_1: C22.1 R12.1 R14.2 U4.1
NetC23_1: C23.1 U5.4
NetC36_1: C36.1 R28.2 R29.1
NetC36_2: C36.2 C37.1 R35.2 U8.6
NetC37_2: C37.2 C38.1 R27.1
NetC38_2: C38.2 R33.2 U10.3
NetC39_1: C39.1 R29.2 U8.3
NetD2_A: D2.A R8.2
NetD4_A: D4.A R9.2
NetD5_A: D5.A R10.2
NetD7_1: D7.1 U5.7
NetD8_A: D8.A R17.2
NetD9_A: D9.A R18.2
NetD10_A: D10.A R19.2
NetD11_A: D11.A R20.2
NetD12_A: D12.A R21.2
NetD13_2: D13.2 R26.2 U7.2
NetD14_2: D14.2 R31.2 U7.3
NetQ1_1: Q1.1 R5.2 U2.1
NetR1_2: R1.2 U1.5
NetR2_1: R2.1 R4.2 U6.19
NetR6_2: R6.2 U3.5
NetR11_1: R11.1 R13.2
NetR15_1: R15.1 R16.2
NetR27_2: R27.2 R30.1 R38.2 U10.6
NetR28_1: R28.1 U7.6
NetR30_2: R30.2 R32.2 U9.3
NetR34_1: R34.1 R39.1 VR4.3
NetR35_1: R35.1 R41.2 U8.2
NetR36_1: R36.1 R43.2
NetR36_2: R36.2 U7.1
NetR37_1: R37.1 R44.2
NetR37_2: R37.2 U7.8
NetR38_1: R38.1 R42.2 U10.2
NetR39_2: R39.2 R40.1 U9.2
NetR40_2: R40.2 R47.1 U9.6
NetR41_1: R41.1 R45.2
NetR42_1: R42.1 R46.2
NetR43_1: R43.1 R44.1 U11.2
NetR47_2: R47.2 R49.2 U12.3
NetR48_1: R48.1 R49.1 VR5.3
NetR50_2: R50.2 R51.1 U11.6
NetR51_2: R51.2 U11.1 U11.3
NetR52_1: R52.1 R53.2 U12.2
NetR52_2: R52.2 U6.10 U12.6
ON/OFF: C32.2 ON/OFF1.2 R22.1 U6.14
OSC_IN_8MHZ: C27.1 U6.5 Y1.2
OSC_OUT_8MHZ: C31.1 U6.6 Y1.1
RESET: C35.2 R25.1 RESET1.2 U6.7
STM_RX: C26.3 U6.21
STM_TX: C26.2 U6.22
SWCLK: C28.3 U6.25
SWDIO: C28.2 U6.26
VDD3.3V: BOOST1.3 BOOST2.1 C16.1 C25.4 C26.4 C28.1 C29.1 C30.1 D6.1 R9.1 R12.2 R22.2 R23.2 R24.2 R25.2 U4.2 U6.9 U6.24 U6.36 U6.48
VSENS_3.3V: R13.1 U5.3 U5.5 VR3.3
VSENS_5V: R3.1 U1.4 VR1.3
VSENS_(-5V): R7.1 U3.4 VR2.3
pads on no net: BOOST1. BOOST2. C25. C26. C28. J1. U1.2 U1.3 U3.2 U3.3 U5.9 U6.1 U6.2 U6.3 U6.4 U6.11 U6.18 U6.27 U6.28 U6.30 U6.31 U6.32 U6.33 U6.37 U6.38 U6.39 U6.40 U6.41 U6.42 U6.43 U7.9 U8.1 U8.5 U8.8 U8.9 U9.1 U9.5 U9.8 U9.9 U10.1 U10.5 U10.8 U10.9 U11.9 U12.1 U12.5 U12.8 U12.9
copper on no net:
  other v1: 9023.35,1681.69 9066.65,1681.69 9408.35,1681.69 9451.65,1681.69 14153.35,1681.69 14196.65,1681.69 14768.35,1681.69 14811.65,1681.69 15158.35,1681.69 15201.65,1681.69 16683.35,1681.69 16726.65,1681.69 9023.35,1725 9066.65,1725 9408.35,1725 9451.65,1725 14153.35,1725 14196.65,1725 14768.35,1725 14811.65,1725 15158.35,1725 15201.65,1725 16683.35,1725 16726.65,1725 9023.35,1768.31 9066.65,1768.31 9408.35,1768.31 9451.65,1768.31 14153.35,1768.31 14196.65,1768.31 14768.35,1768.31 14811.65,1768.31 15158.35,1768.31 15201.65,1768.31 16683.35,1768.31 16726.65,1768.31 10848.35,8986.69 10891.65,8986.69 10848.35,9030 10891.65,9030 10848.35,9073.31 10891.65,9073.31

## Text inside footprints (layer, text, board x,y; h text height)
J1: Mechanical 13 "PCB EDGE" at 17607.95,1477.44 h32 r90